# Allegro board EX2.brd
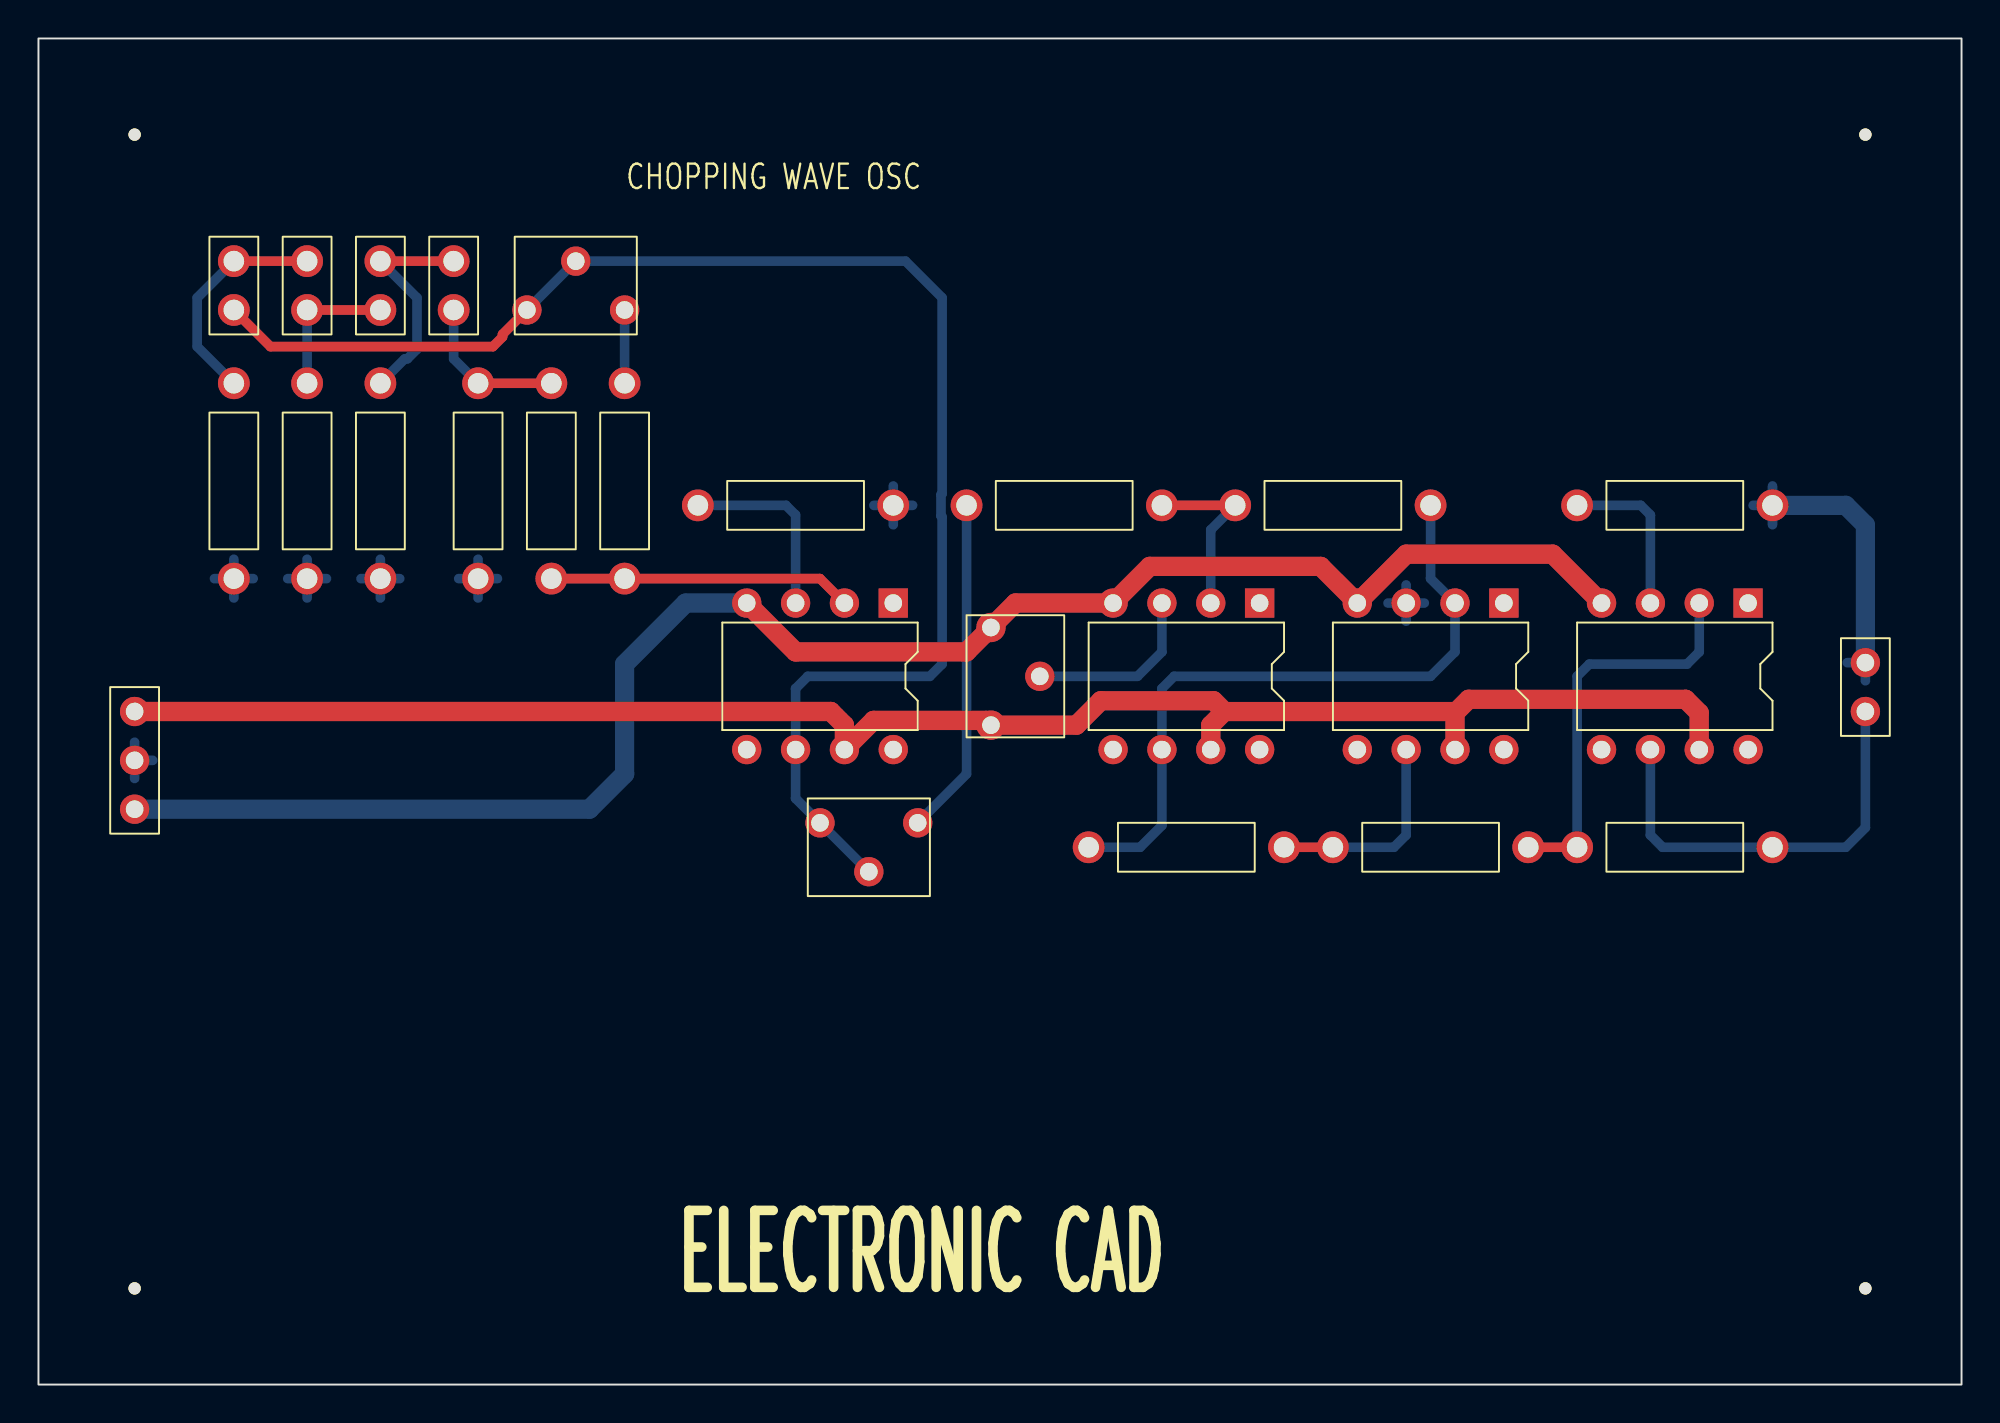
[diagram p0: board, top side]
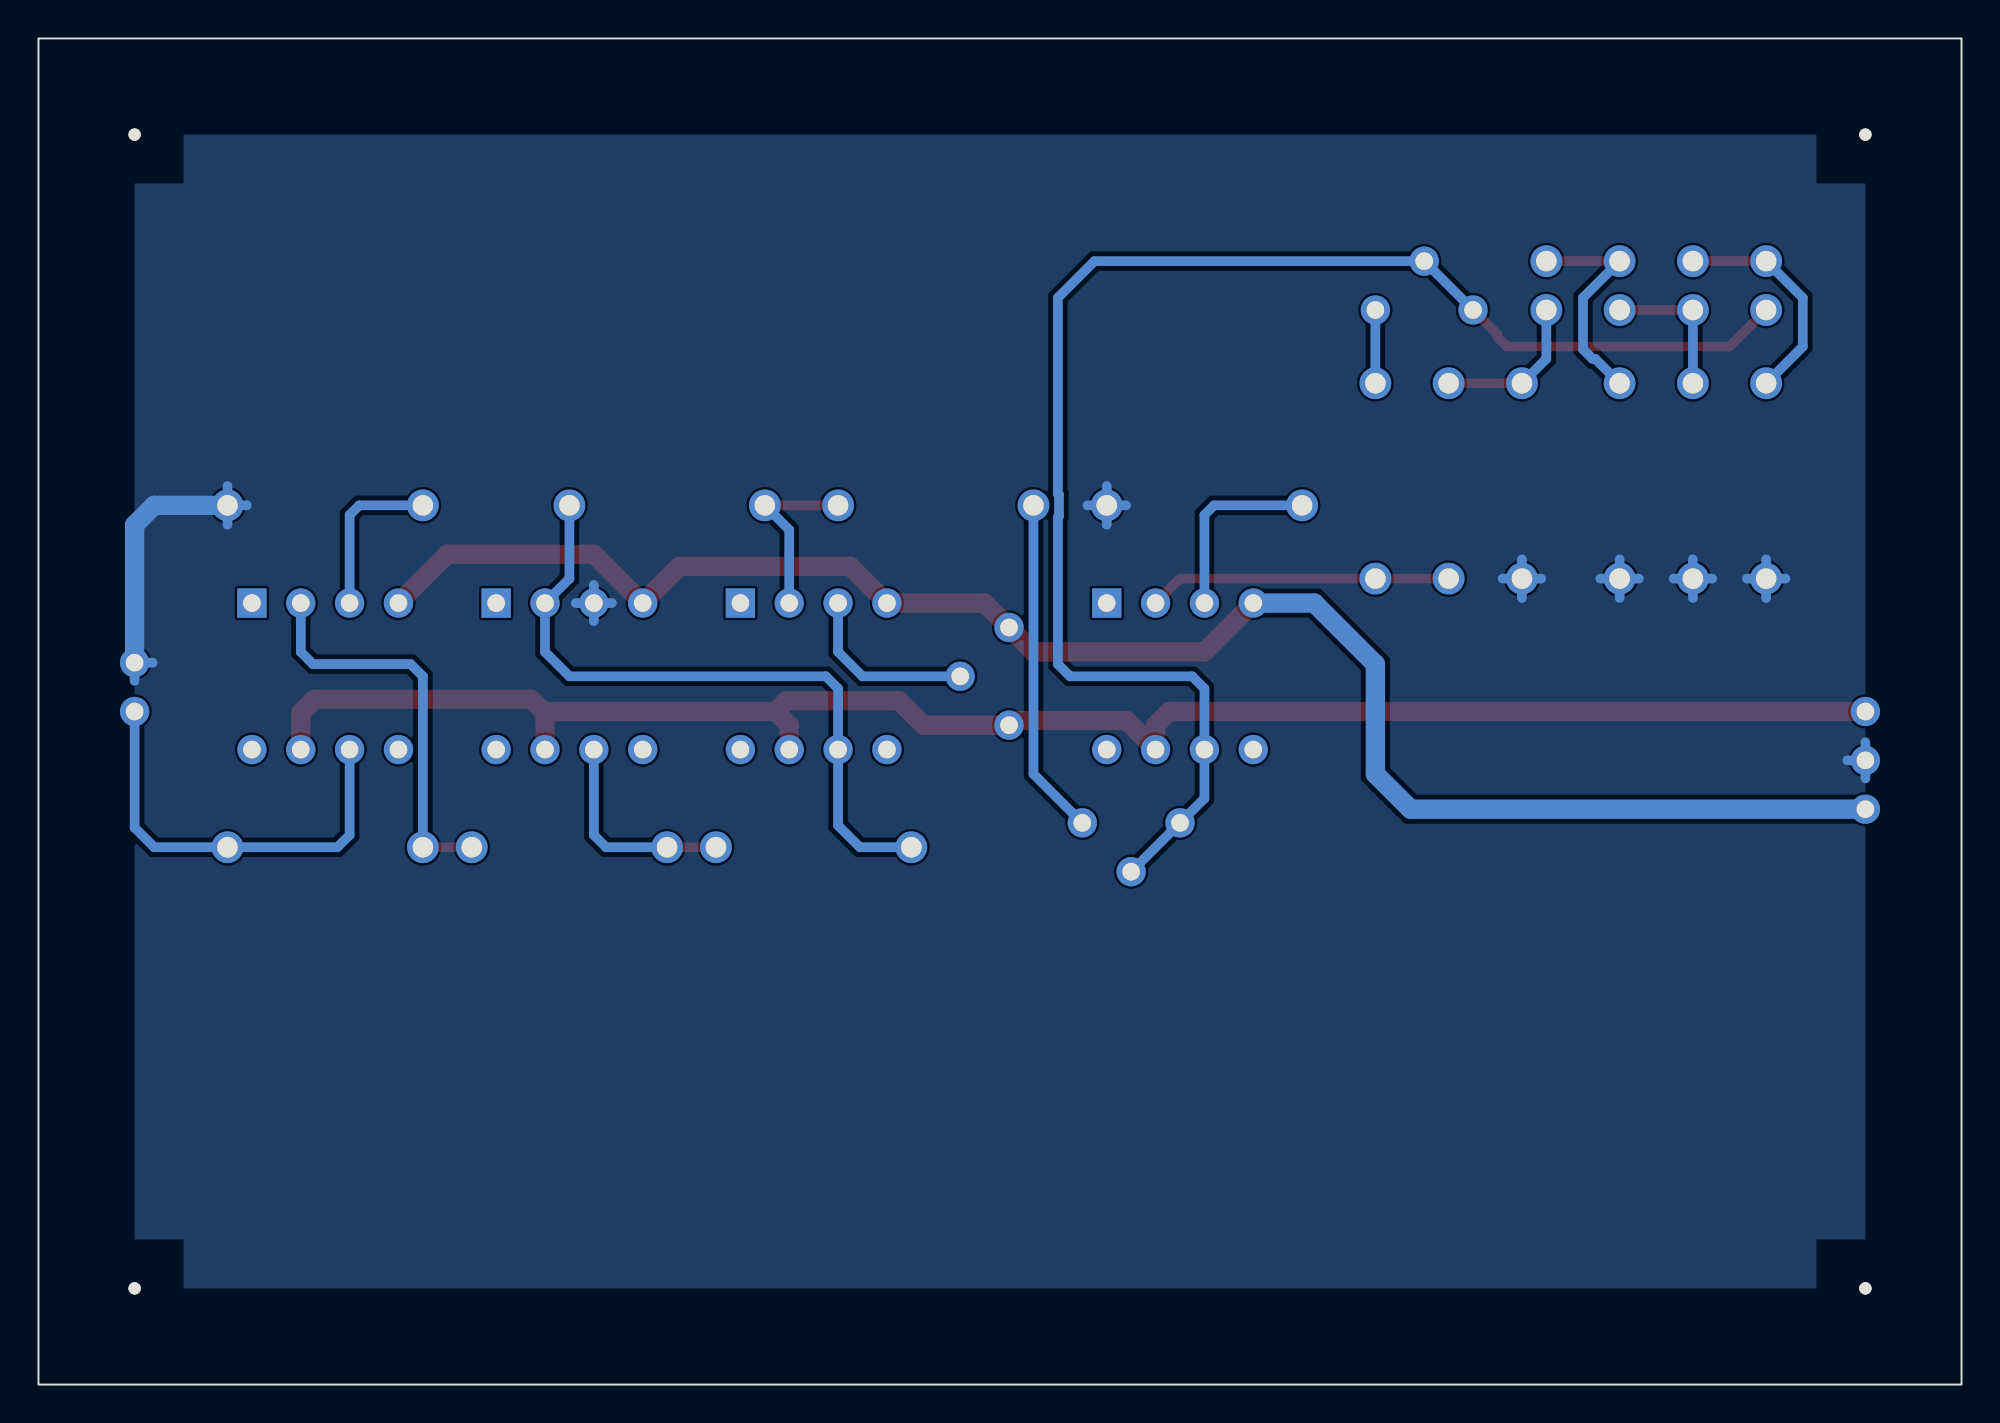
[diagram p1: board, bottom side, seen from below]

Outline 100 x 70 mm; copper layers: TOP, BOTTOM. Coordinates in mm from the lower left corner of the outline.
Outline path: rectangle 0,0 100,70

## Design rules (mm)
constraint set DEFAULT: min track width 0.5
nets with their own width: min track width 1; nets +12V -12V GND

## Placement (name value [footprint] x y rotation side)
C1  0.001uF  [CAPCK05]  10.16 55.88 0 top
C2  0.001uF  [CAPCK05]  13.97 58.42 180 top
C3  0.001uF  [CAPCK05]  17.78 55.88 0 top
C4  0.001uF  [CAPCK05]  21.59 58.42 180 top
J1  CON3  [JUMPER3]  5 35 270 top
J2  CON2  [JUMPER2]  95 35 90 top
NOREF  -  [unnamed]  5 5 0 top
NOREF#2  -  [unnamed]  95 5 0 top
NOREF#3  -  [unnamed]  95 65 0 top
NOREF#4  -  [unnamed]  5 65 0 top
NOREF#5  -  [#2]  0 70 0 top
NOREF#6  -  [#2]  0 0 90 top
R1  10k  [RES400]  62.23 45.72 270 top
R2  15k  [RES400]  30.48 41.91 0 top
R3  10k  [RES400]  26.67 52.07 180 top
R4  20k  [RES400]  48.26 45.72 270 top
R5  4.7k  [RES400]  10.16 52.07 180 top
R6  4.7k  [RES400]  13.97 52.07 180 top
R7  4.7k  [RES400]  17.78 52.07 180 top
R8  4.7k  [RES400]  22.86 52.07 180 top
R9  1k  [RES400]  44.45 45.72 90 top
R10  8.2k  [RES400]  64.77 27.94 90 top
R11  10k  [RES400]  90.17 27.94 90 top
R12  2.2k  [RES400]  77.47 27.94 90 top
R13  5.1k  [RES400]  80.01 45.72 270 top
U1  LF356  [DIP8_3]  44.45 40.64 270 top
U2  LF356  [DIP8_3]  63.5 40.64 270 top
U3  LF356  [DIP8_3]  76.2 40.64 270 top
U4  LF356  [DIP8_3]  88.9 40.64 270 top
VR1  470k  [RESADJ]  30.48 55.88 270 top
VR2  100k  [RESADJ]  40.64 29.21 90 top
VR3  10k  [RESADJ]  49.53 34.29 180 top

## Library data of the parts
C1-C4 = CAP NP: Tolerance: ***; User Part Number: ***
J1 = CON3: User Part Number: ***
J2 = CON2: User Part Number: ***
R1-R13 = R: Tolerance: ***; User Part Number: ***
U1-U4 = LF356_1: Tolerance: ***; User Part Number: ***
VR1-VR3 = POT: Tolerance: ***; User Part Number: ***

## Footprints (pads in the part's own frame, mm; a bottom-side part is the same pattern mirrored in y, then rotated)
CAPCK05
  round 1.651 hole 1.067: 1(0,0) 2(0,2.54)
DIP8_3
  rect 1.524x1.524 hole 0.914: 1(0,0)
  round 1.524 hole 0.914: 2(0,-2.54) 3(0,-5.08) 4(0,-7.62) 5(7.62,-7.62) 6(7.62,-5.08) 7(7.62,-2.54) 8(7.62,0)
JUMPER2
  round 1.524 hole 0.914: 1(0,0) 2(2.54,0)
JUMPER3
  round 1.524 hole 0.914: 1(0,0) 2(2.54,0) 3(5.08,0)
RES400
  round 1.651 hole 1.067: 1(0,0) 2(0,10.16)
RESADJ
  round 1.524 hole 0.914: 1(0,0) 2(-2.54,-2.54) 3(0,-5.08)
unnamed
  round 0.635 hole 3.175 unplated: (0,0)

## Nets
+12V: J1.1 U1.7 U2.7 U3.7 U4.7 VR3.1
-12V: J1.3 U1.4(V-) U2.4(V-) U3.4(V-) U4.4(V-) VR3.3
GND: J1.2 J2.2 R5.2 R6.2 R7.2 R8.2 R9.1 R13.2 U3.3
OUT: J2.1 R11.1 U4.6
SIG: R1.2 R10.2 U2.6 U3.2
N00673: C1.2 C2.1 R5.1
N00688: C1.1 U1.6 VR1.2(WIPER) VR1.3 VR2.1 VR2.2(WIPER)
N00715: R2.2 VR1.1
N00719: C2.2 C3.1 R6.1
N00723: C3.2 C4.1 R7.1
N00727: C4.2 R3.1 R8.1
N00731: R2.1 R3.2 U1.2
N00851: R9.2 U1.3
N01050: R4.1 VR2.3
N01054: R1.1 R4.2 U2.2
N01199: U2.3 VR3.2(WIPER)
N02068: R13.1 U4.3
N02102: R10.1 R12.2 U3.6
N02119: R11.2 R12.1 U4.2

Pads without a net: U1 1 5 8; U2 1 5 8; U3 1 5 8; U4 1 5 8

## Routing (per net, layer and track width the routed paths; a pad name or vN(x,y) marks a point on that pad's centre or on a via; arc(x,y) is an arc through that point)
+12V: length 91.1
  TOP w1: U2.7 60.96,34.29 61.67,35 ; 73.66,34.92 73.59,35 61.67,35 ; 73.66,34.92 74.37,35.63 85.65,35.63 86.36,34.92 U4.7 ; 73.66,34.92 U3.7 ; 61.67,35 61.11,35.56 55.24,35.56 53.98,34.29 VR3.1 49.28,34.54 43.43,34.54 U1.7 41.91,34.29 41.2,35 J1.1
-12V: length 89.9
  TOP w1: U1.4 39.37,38.1 48.26,38.1 VR3.3 50.8,40.64 U2.4 57.78,42.55 66.67,42.55 U3.4 71.12,43.18 78.74,43.18 U4.4
  BOTTOM w1: J1.3 28.65,29.92 30.48,31.75 30.48,37.47 33.66,40.64 U1.4
GND: length 44
  BOTTOM w0.5: R9.1 45.46,45.72 ; R9.1 44.45,46.73 ; R9.1 44.45,44.71 ; R9.1 43.44,45.72 ; 10.16,40.9 R5.2 ; R5.2 11.17,41.91 ; R5.2 9.15,41.91 ; R5.2 10.16,42.92 ; R6.2 14.98,41.91 ; R6.2 13.97,40.9 ; R6.2 12.96,41.91 ; R6.2 13.97,42.92 ; R8.2 23.87,41.91 ; R8.2 22.86,42.92 ; R8.2 22.86,40.9 ; R8.2 21.85,41.91 ; R13.2 90.17,46.73 ; R13.2 90.17,44.71 ; R13.2 89.16,45.72 ; 17.78,40.9 R7.2 ; R7.2 18.79,41.91 ; R7.2 16.77,41.91 ; R7.2 17.78,42.92 ; 71.12,39.7 U3.3 ; U3.3 70.18,40.64 ; U3.3 72.06,40.64 ; U3.3 71.12,41.58 ; 95,36.6 J2.2 94.06,37.54 ; J1.2 5,33.4 ; J1.2 5.94,32.46 ; J1.2 5,31.52
  BOTTOM w1: R13.2 93.98,45.72 95,44.7 J2.2
OUT: length 22.4
  BOTTOM w0.5: U4.6 83.82,28.57 84.45,27.94 R11.1 93.98,27.94 95,28.96 J2.1
SIG: length 35.6
  BOTTOM w0.5: R1.2 72.39,41.91 U3.2 73.66,38.1 72.39,36.83 59.05,36.83 58.42,36.2 U2.6 58.42,29.07 57.28,27.94 R10.2
N00673: length 11.7
  TOP w0.5: C1.2 C2.1
  BOTTOM w0.5: C1.2 8.26,56.52 8.26,53.98 R5.1
N00688: length 78.7
  TOP w0.5: C1.1 12.06,53.98 23.63,53.98 24.13,54.48 24.13,54.61 VR1.3
  BOTTOM w0.5: VR2.2 VR2.1 39.37,30.48 U1.6 39.37,36.2 40.01,36.83 46.35,36.83 46.99,37.47 46.99,45.11 46.93,45.17 46.93,46.27 46.99,46.33 46.99,56.52 45.09,58.42 VR1.2 VR1.3
N00715: length 3.8
  BOTTOM w0.5: VR1.1 R2.2
N00719: length 7.6
  TOP w0.5: C3.1 C2.2
  BOTTOM w0.5: R6.1 C2.2
N00723: length 11.8
  TOP w0.5: C3.2 C4.1
  BOTTOM w0.5: R7.1 19.05,53.34 19.18,53.34 19.68,53.84 19.68,56.52 C3.2
N00727: length 8.1
  TOP w0.5: R8.1 R3.1
  BOTTOM w0.5: C4.2 21.59,53.34 R8.1
N00731: length 15.8
  TOP w0.5: R3.2 R2.1 40.64,41.91 U1.2
N00851: length 9.9
  BOTTOM w0.5: R9.2 38.87,45.72 39.37,45.22 U1.3
N01050: length 17.6
  BOTTOM w0.5: VR2.3 48.26,31.75 R4.1
N01054: length 9.4
  TOP w0.5: R4.2 R1.1
  BOTTOM w0.5: U2.2 60.96,44.45 R1.1
N01199: length 9.4
  BOTTOM w0.5: VR3.2 57.15,36.83 58.42,38.1 U2.3
N02068: length 8.6
  BOTTOM w0.5: R13.1 83.32,45.72 83.82,45.22 U4.3
N02102: length 11.1
  TOP w0.5: R10.1 R12.2
  BOTTOM w0.5: U3.6 71.12,28.57 70.48,27.94 R12.2
N02119: length 20.8
  TOP w0.5: R12.1 R11.2
  BOTTOM w0.5: U4.2 86.36,38.1 85.72,37.47 80.64,37.47 80.01,36.83 R11.2

## Copper pours and planes (outline as drawn; the poured copper is in the pictures)
GND on BOTTOM: 5,5 5,65 95,65 95,5

## Text on the board
Ref Des/Silkscreen Top: CHOPPING WAVE OSC | ELECTRONIC CAD
COMPVAL_TYPE_TOP: FIGURE | FINISHED_SIZE | 0.914 | 1.067 | 3.175 | DRILL CHART: TOP to BOTTOM | ALL UNITS ARE IN MILLIMETERS | PLATED | NON-PLATED | QTY | 46 | 34 | 4
